# Altium PCB Photomodule.PcbDoc
Units mm, origin at the board's own origin, x right, y up, seen from the top; angles counter-clockwise.
Board outline 150 x 150 mm, 2 copper layers (Top Layer, Bottom Layer); 98 components, 80 nets, 420 pads, 0 vias.
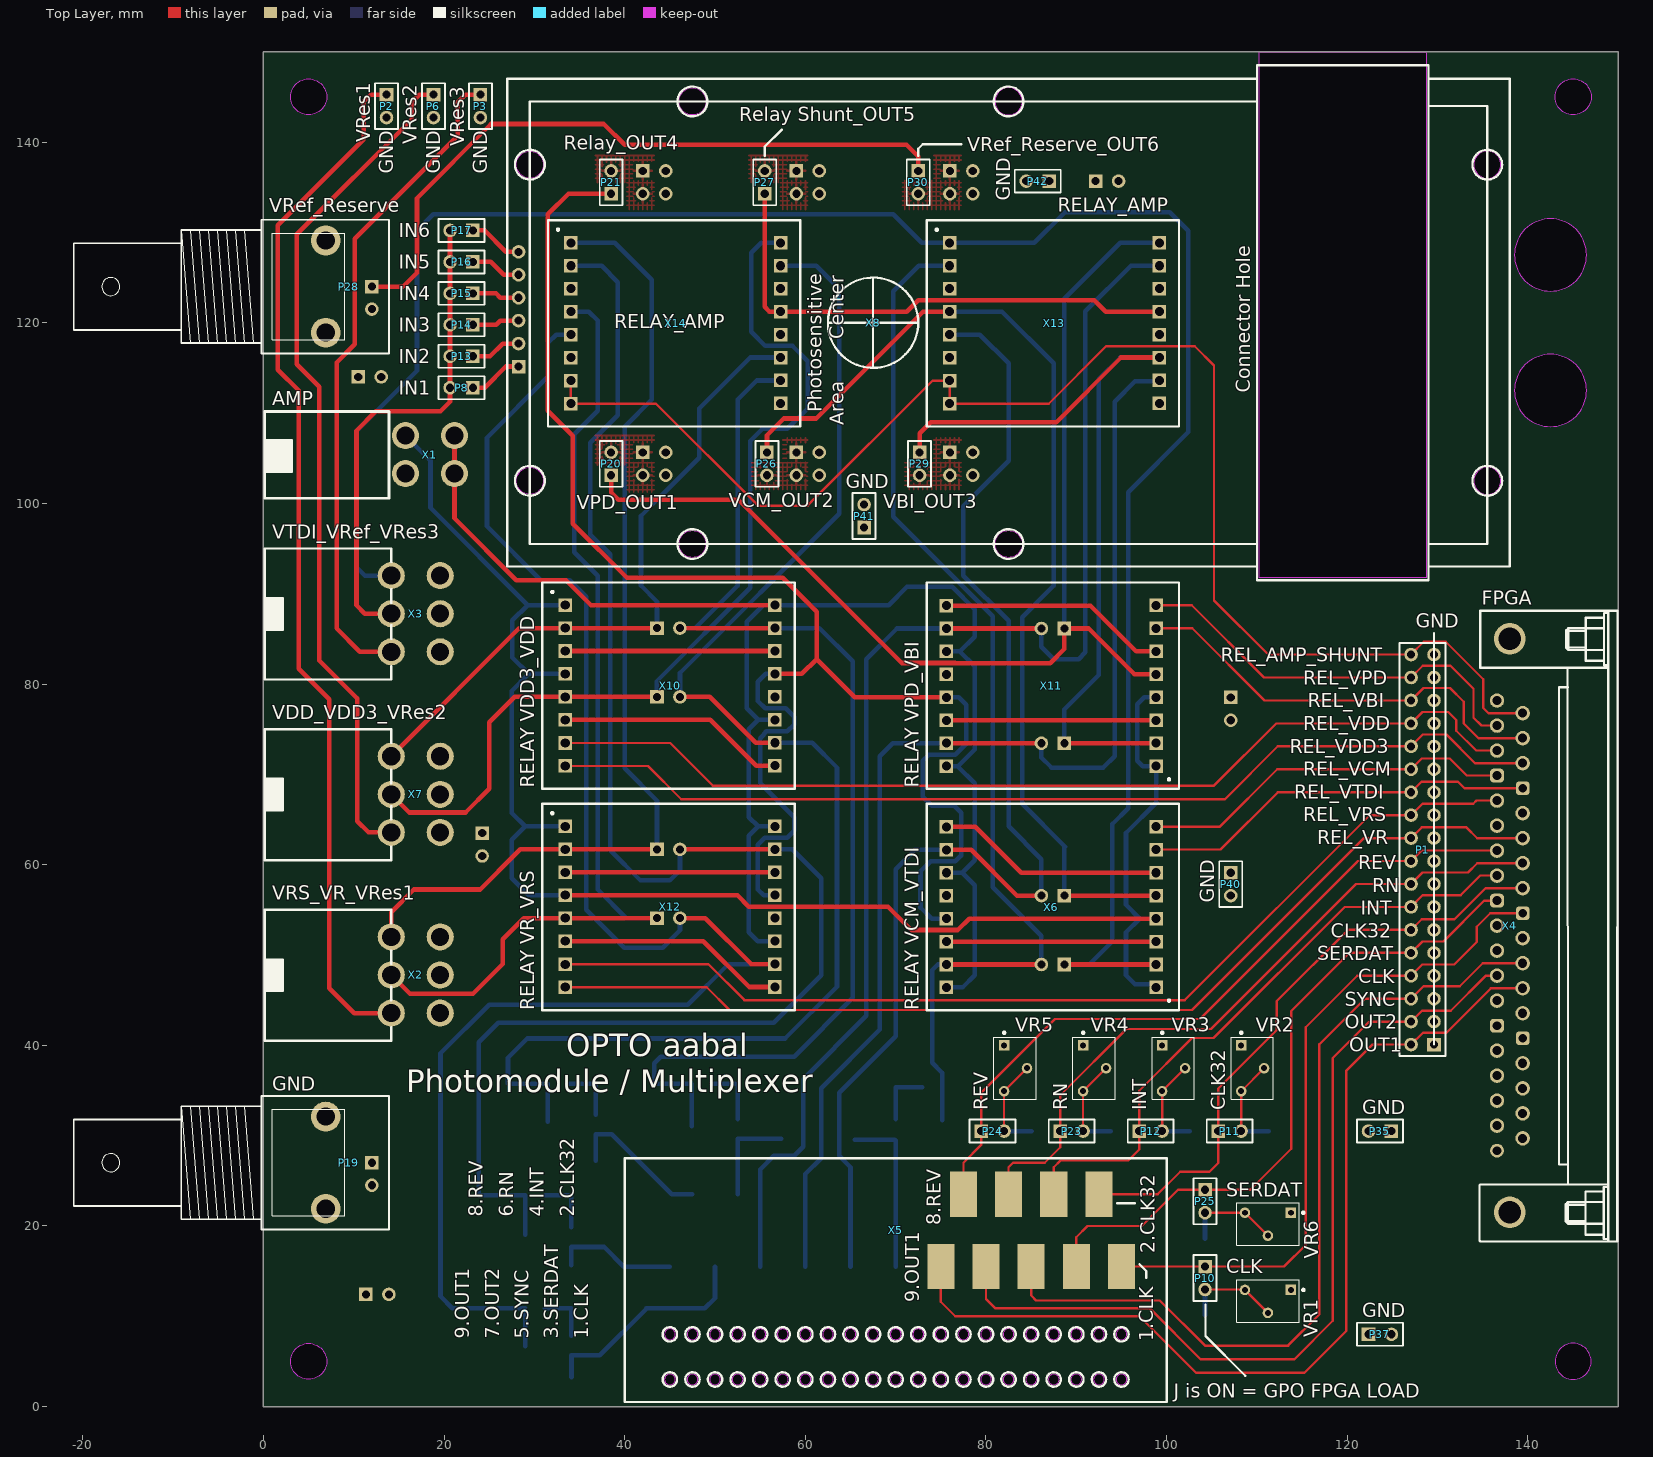
[diagram p0: Top Layer view]
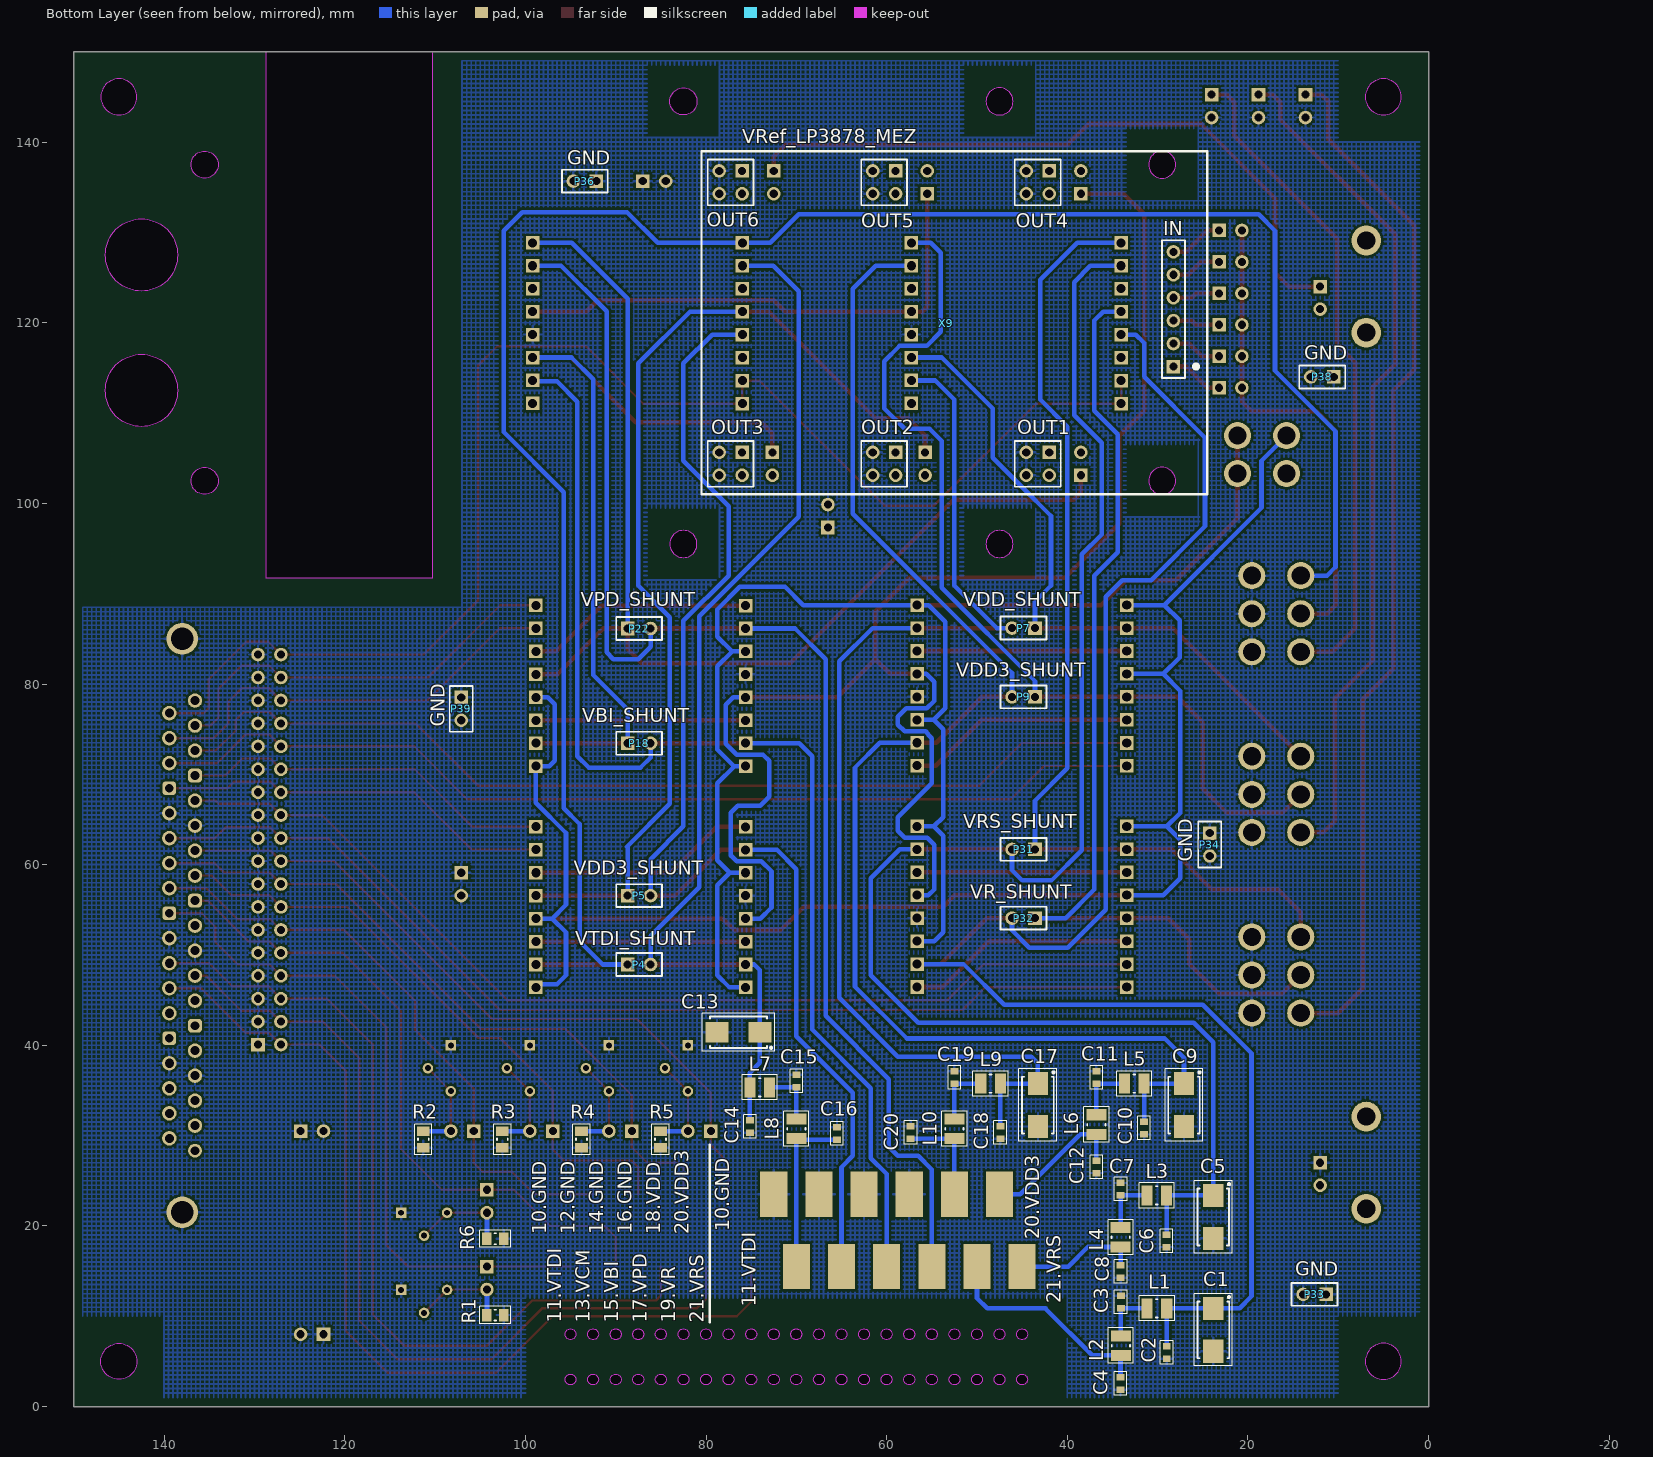
[diagram p1: Bottom Layer view, seen from below]

## Layer stack, top to bottom
Top Solder: solder mask 0.0102, Solder Resist, Dk 3.5
Top Layer: signal copper 0.0356
Dielectric 1: dielectric 0.32, FR-4, Dk 4.8
Bottom Layer: signal copper 0.0356
Bottom Solder: solder mask 0.0102, Solder Resist, Dk 3.5

## Board outline
0,0 0,150 150,150 150,0
cut-out: 138.5,127.5 ccw(c142.5,127.5) 142.5,123.5 ccw(c142.5,127.5) 146.5,127.5 ccw(c142.5,127.5) 142.5,131.5 ccw(c142.5,127.5)
cut-out: 138.5,112.5 ccw(c142.5,112.5) 142.5,108.5 ccw(c142.5,112.5) 146.5,112.5 ccw(c142.5,112.5) 142.5,116.5 ccw(c142.5,112.5)
cut-out: 31,137.5 cw(c29.5,137.5) 29.5,136 cw(c29.5,137.5) 28,137.5 cw(c29.5,137.5) 29.5,139 cw(c29.5,137.5)
cut-out: 49,144.5 cw(c47.5,144.5) 47.5,143 cw(c47.5,144.5) 46,144.5 cw(c47.5,144.5) 47.5,146 cw(c47.5,144.5)
cut-out: 82.5,143 ccw(c82.5,144.5) 84,144.5 ccw(c82.5,144.5) 82.5,146 ccw(c82.5,144.5) 81,144.5 ccw(c82.5,144.5)
cut-out: 135.5,136 ccw(c135.5,137.5) 137,137.5 ccw(c135.5,137.5) 135.5,139 ccw(c135.5,137.5) 134,137.5 ccw(c135.5,137.5)
cut-out: 135.5,101 ccw(c135.5,102.5) 137,102.5 ccw(c135.5,102.5) 135.5,104 ccw(c135.5,102.5) 134,102.5 ccw(c135.5,102.5)
cut-out: 31,102.5 cw(c29.5,102.5) 29.5,101 cw(c29.5,102.5) 28,102.5 cw(c29.5,102.5) 29.5,104 cw(c29.5,102.5)
cut-out: 49,95.5 cw(c47.5,95.5) 47.5,94 cw(c47.5,95.5) 46,95.5 cw(c47.5,95.5) 47.5,97 cw(c47.5,95.5)
cut-out: 84,95.5 cw(c82.5,95.5) 82.5,94 cw(c82.5,95.5) 81,95.5 cw(c82.5,95.5) 82.5,97 cw(c82.5,95.5)
cut-out: 5,3 cw(c5,5) 3,5 cw(c5,5) 5,7 cw(c5,5) 7,5 cw(c5,5)
cut-out: 143,5 ccw(c145,5) 145,3 ccw(c145,5) 147,5 ccw(c145,5) 145,7 ccw(c145,5)
cut-out: 145,143 cw(c145,145) 143,145 cw(c145,145) 145,147 cw(c145,145) 147,145 cw(c145,145)
cut-out: 5,143 cw(c5,145) 3,145 cw(c5,145) 5,147 cw(c5,145) 7,145 cw(c5,145)
cut-out: 44.4,3 ccw(c45,3) 45,2.4 ccw(c45,3) 45.6,3 ccw(c45,3) 45,3.6 ccw(c45,3)
cut-out: 46.9,3 ccw(c47.5,3) 47.5,2.4 ccw(c47.5,3) 48.1,3 ccw(c47.5,3) 47.5,3.6 ccw(c47.5,3)
cut-out: 49.4,3 ccw(c50,3) 50,2.4 ccw(c50,3) 50.6,3 ccw(c50,3) 50,3.6 ccw(c50,3)
cut-out: 51.9,3 ccw(c52.5,3) 52.5,2.4 ccw(c52.5,3) 53.1,3 ccw(c52.5,3) 52.5,3.6 ccw(c52.5,3)
cut-out: 54.4,3 ccw(c55,3) 55,2.4 ccw(c55,3) 55.6,3 ccw(c55,3) 55,3.6 ccw(c55,3)
cut-out: 56.9,3 ccw(c57.5,3) 57.5,2.4 ccw(c57.5,3) 58.1,3 ccw(c57.5,3) 57.5,3.6 ccw(c57.5,3)
cut-out: 59.4,3 ccw(c60,3) 60,2.4 ccw(c60,3) 60.6,3 ccw(c60,3) 60,3.6 ccw(c60,3)
cut-out: 61.9,3 ccw(c62.5,3) 62.5,2.4 ccw(c62.5,3) 63.1,3 ccw(c62.5,3) 62.5,3.6 ccw(c62.5,3)
cut-out: 64.4,3 ccw(c65,3) 65,2.4 ccw(c65,3) 65.6,3 ccw(c65,3) 65,3.6 ccw(c65,3)
cut-out: 66.9,3 ccw(c67.5,3) 67.5,2.4 ccw(c67.5,3) 68.1,3 ccw(c67.5,3) 67.5,3.6 ccw(c67.5,3)
cut-out: 69.4,3 ccw(c70,3) 70,2.4 ccw(c70,3) 70.6,3 ccw(c70,3) 70,3.6 ccw(c70,3)
cut-out: 71.9,3 ccw(c72.5,3) 72.5,2.4 ccw(c72.5,3) 73.1,3 ccw(c72.5,3) 72.5,3.6 ccw(c72.5,3)
cut-out: 74.4,3 ccw(c75,3) 75,2.4 ccw(c75,3) 75.6,3 ccw(c75,3) 75,3.6 ccw(c75,3)
cut-out: 76.9,3 ccw(c77.5,3) 77.5,2.4 ccw(c77.5,3) 78.1,3 ccw(c77.5,3) 77.5,3.6 ccw(c77.5,3)
cut-out: 79.4,3 ccw(c80,3) 80,2.4 ccw(c80,3) 80.6,3 ccw(c80,3) 80,3.6 ccw(c80,3)
cut-out: 81.9,3 ccw(c82.5,3) 82.5,2.4 ccw(c82.5,3) 83.1,3 ccw(c82.5,3) 82.5,3.6 ccw(c82.5,3)
cut-out: 84.4,3 ccw(c85,3) 85,2.4 ccw(c85,3) 85.6,3 ccw(c85,3) 85,3.6 ccw(c85,3)
cut-out: 86.9,3 ccw(c87.5,3) 87.5,2.4 ccw(c87.5,3) 88.1,3 ccw(c87.5,3) 87.5,3.6 ccw(c87.5,3)
cut-out: 89.4,3 ccw(c90,3) 90,2.4 ccw(c90,3) 90.6,3 ccw(c90,3) 90,3.6 ccw(c90,3)
cut-out: 91.9,3 ccw(c92.5,3) 92.5,2.4 ccw(c92.5,3) 93.1,3 ccw(c92.5,3) 92.5,3.6 ccw(c92.5,3)
cut-out: 94.4,3 ccw(c95,3) 95,2.4 ccw(c95,3) 95.6,3 ccw(c95,3) 95,3.6 ccw(c95,3)
cut-out: 94.4,8 ccw(c95,8) 95,7.4 ccw(c95,8) 95.6,8 ccw(c95,8) 95,8.6 ccw(c95,8)
cut-out: 91.9,8 ccw(c92.5,8) 92.5,7.4 ccw(c92.5,8) 93.1,8 ccw(c92.5,8) 92.5,8.6 ccw(c92.5,8)
cut-out: 89.4,8 ccw(c90,8) 90,7.4 ccw(c90,8) 90.6,8 ccw(c90,8) 90,8.6 ccw(c90,8)
cut-out: 86.9,8 ccw(c87.5,8) 87.5,7.4 ccw(c87.5,8) 88.1,8 ccw(c87.5,8) 87.5,8.6 ccw(c87.5,8)
cut-out: 84.4,8 ccw(c85,8) 85,7.4 ccw(c85,8) 85.6,8 ccw(c85,8) 85,8.6 ccw(c85,8)
cut-out: 81.9,8 ccw(c82.5,8) 82.5,7.4 ccw(c82.5,8) 83.1,8 ccw(c82.5,8) 82.5,8.6 ccw(c82.5,8)
cut-out: 79.4,8 ccw(c80,8) 80,7.4 ccw(c80,8) 80.6,8 ccw(c80,8) 80,8.6 ccw(c80,8)
cut-out: 76.9,8 ccw(c77.5,8) 77.5,7.4 ccw(c77.5,8) 78.1,8 ccw(c77.5,8) 77.5,8.6 ccw(c77.5,8)
cut-out: 74.4,8 ccw(c75,8) 75,7.4 ccw(c75,8) 75.6,8 ccw(c75,8) 75,8.6 ccw(c75,8)
cut-out: 71.9,8 ccw(c72.5,8) 72.5,7.4 ccw(c72.5,8) 73.1,8 ccw(c72.5,8) 72.5,8.6 ccw(c72.5,8)
cut-out: 69.4,8 ccw(c70,8) 70,7.4 ccw(c70,8) 70.6,8 ccw(c70,8) 70,8.6 ccw(c70,8)
cut-out: 66.9,8 ccw(c67.5,8) 67.5,7.4 ccw(c67.5,8) 68.1,8 ccw(c67.5,8) 67.5,8.6 ccw(c67.5,8)
cut-out: 64.4,8 ccw(c65,8) 65,7.4 ccw(c65,8) 65.6,8 ccw(c65,8) 65,8.6 ccw(c65,8)
cut-out: 61.9,8 ccw(c62.5,8) 62.5,7.4 ccw(c62.5,8) 63.1,8 ccw(c62.5,8) 62.5,8.6 ccw(c62.5,8)
cut-out: 59.4,8 ccw(c60,8) 60,7.4 ccw(c60,8) 60.6,8 ccw(c60,8) 60,8.6 ccw(c60,8)
cut-out: 56.9,8 ccw(c57.5,8) 57.5,7.4 ccw(c57.5,8) 58.1,8 ccw(c57.5,8) 57.5,8.6 ccw(c57.5,8)
cut-out: 54.4,8 ccw(c55,8) 55,7.4 ccw(c55,8) 55.6,8 ccw(c55,8) 55,8.6 ccw(c55,8)
cut-out: 51.9,8 ccw(c52.5,8) 52.5,7.4 ccw(c52.5,8) 53.1,8 ccw(c52.5,8) 52.5,8.6 ccw(c52.5,8)
cut-out: 49.4,8 ccw(c50,8) 50,7.4 ccw(c50,8) 50.6,8 ccw(c50,8) 50,8.6 ccw(c50,8)
cut-out: 46.9,8 ccw(c47.5,8) 47.5,7.4 ccw(c47.5,8) 48.1,8 ccw(c47.5,8) 47.5,8.6 ccw(c47.5,8)
cut-out: 44.4,8 ccw(c45,8) 45,7.4 ccw(c45,8) 45.6,8 ccw(c45,8) 45,8.6 ccw(c45,8)
cut-out: 128.75,91.75 110.25,91.75 110.25,150 128.75,150

## Design rules (kind name [scope] priority, off if disabled: settings)
Clearance [All] p1: gap=0.254 ignorepadtopadclearanceinfootprint=FALSE except(0: Arc-Hole Track-Hole SMDPad-Hole THPad-Hole Via-Hole Fill-Hole Poly-Hole Region-Hole Text-Hole)
Height [All] p1: minheight=0 maxheight=100 prefheight=50
PolygonConnect [All] p1: connectstyle=Relief reliefconductorwidth=0.254 reliefentries=4 polygonreliefangle="90 Angle" airgapwidth=0.254
RoutingVias [All] p1: holewidth=0.711 width=1.27 viastyle="Through Hole" minholewidth=0.711 minwidth=1.27 maxholewidth=0.711 maxwidth=1.27
SolderMaskExpansion [All] p1: expansion=0.102
Width [All] p1: maxlimit=0.508 minlimit=0.254 preferedwidth=0.254 minimp=50.000000 maximp=50.000000 favimp=50.000000
29 further rules are at their usual default settings.

## Components (designator, comment, footprint, x,y, rotation, side; value= is the part's Value field where it differs from the comment)
C1 "10uF" CAP_TANT_TypeC 23.825,8.5 r270 bottom
C2 "0,1uF" CAP_0603 28.99,6 r90 bottom
C3 "0,1uF" CAP_0603 34.075,11.565 r270 bottom
C4 "0,1uF" CAP_0603 34.11,2.545 r90 bottom
C5 "10uF" CAP_TANT_TypeC 23.834,21 r270 bottom
C6 "0,1uF" CAP_0603 29,18.355 r90 bottom
C7 "0,1uF" CAP_0603 34.085,24.065 r270 bottom
C8 "0,1uF" CAP_0603 34.085,14.945 r90 bottom
C9 "10uF" CAP_TANT_TypeC 27.08,33.375 r270 bottom
C10 "0,1uF" CAP_0603 31.495,30.824 r90 bottom
C11 "0,1uF" CAP_0603 36.779,36.44 r270 bottom
C12 "0,1uF" CAP_0603 36.779,26.545 r90 bottom
C13 "10uF" CAP_TANT_TypeC 76.41,41.45 r0 bottom
C14 "0,1uF" CAP_0603 75.135,31 r90 bottom
C15 "0,1uF" CAP_0603 70,36.04 r270 bottom
C16 "0,1uF" CAP_0603 65.485,30.25 r270 bottom
C17 "10uF" CAP_TANT_TypeC 43.25,33.375 r270 bottom
C18 "0,1uF" CAP_0603 47.415,30.355 r90 bottom
C19 "0,1uF" CAP_0603 52.5,36.44 r270 bottom
C20 "0,1uF" CAP_0603 57.335,30.355 r270 bottom
L1 "4,7uH" IND_2520 30.075,10.875 r0 bottom
L2 "4,7uH" IND_2520 34.075,6.75 r270 bottom
L3 "4,7uH" IND_2520 30.085,23.375 r0 bottom
L4 "4,7uH" IND_2520 34.085,18.75 r270 bottom
L5 "4,7uH" IND_2520 32.58,35.75 r0 bottom
L6 "4,7uH" IND_2520 36.779,31.219 r270 bottom
L7 "4,7uH" IND_2520 74.05,35.35 r180 bottom
L8 "4,7uH" IND_2520 70,30.75 r270 bottom
L9 "4,7uH" IND_2520 48.5,35.75 r0 bottom
L10 "4,7uH" IND_2520 52.5,30.75 r270 bottom
P1 "Header 18X2" HDR2X18 129.6,40.077 r90 top
P2 "VRes1" HDR1X2 13.628,145.25 r270 top
P3 "VRes3" HDR1X2 24.028,145.25 r270 top
P4 "VTDI_SHUNT" HDR1X2 88.673,48.944 r180 bottom
P5 "VDD3_SHUNT" HDR1X2 88.673,56.564 r180 bottom
P6 "VRes2" HDR1X2 18.828,145.25 r270 top
P7 "VDD_SHUNT" HDR1X2 43.577,86.195 r0 bottom
P8 "IN1" HDR1X2 23.2,112.8 r180 top
P9 "VDD3_SHUNT" HDR1X2 43.577,78.575 r0 bottom
P10 "LOAD_CLK" HDR1X2 104.25,15.5 r270 top
P11 "LOAD_CLK32" HDR1X2 105.71,30.5 r0 top
P12 "LOAD_INT" HDR1X2 96.96,30.5 r0 top
P13 "IN2" HDR1X2 23.2,116.284 r180 top
P14 "IN3" HDR1X2 23.2,119.768 r180 top
P15 "IN4" HDR1X2 23.2,123.252 r180 top
P16 "IN5" HDR1X2 23.2,126.736 r180 top
P17 "IN6" HDR1X2 23.2,130.22 r180 top
P18 "VBI_SHUNT" HDR1X2 88.673,73.444 r180 bottom
P19 "GND" "BNC_RA CON" 12,27 r0 top
P20 "VPD_OUT1" HDR1X2 38.5,103.11 r90 top
P21 "Relay_OUT4" HDR1X2 38.5,134.273 r90 top
P22 "VPD_SHUNT" HDR1X2 88.673,86.144 r180 bottom
P23 "LOAD_RN" HDR1X2 88.21,30.5 r0 top
P24 "LOAD_REV" HDR1X2 79.46,30.5 r0 top
P25 "LOAD_SERDAT" HDR1X2 104.25,24 r270 top
P26 "VCM_OUT2" HDR1X2 55.75,105.65 r270 top
P27 "Relay Shunt_OUT5" HDR1X2 55.5,134.274 r90 top
P28 "VRef_Reserve" "BNC_RA CON" 12,124 r0 top
P29 "VBI_OUT3" HDR1X2 72.65,105.65 r270 top
P30 "VRef_Reserve_OUT6" HDR1X2 72.5,136.814 r270 top
P31 "VRS_SHUNT" HDR1X2 43.577,61.695 r0 bottom
P32 "VR_SHUNT" HDR1X2 43.577,54.075 r0 bottom
P33 "GND" HDR1X2 11.35,12.426 r0 bottom
P34 "GND" HDR1X2 24.221,63.5 r270 bottom
P35 "GND" HDR1X2 124.89,30.5 r180 top
P36 "GND" HDR1X2 92.142,135.673 r0 bottom
P37 "GND" HDR1X2 122.35,8 r0 top
P38 "GND" HDR1X2 10.5,114 r0 bottom
P39 "GND" HDR1X2 107.1,78.524 r270 bottom
P40 "GND" HDR1X2 107.1,59.104 r270 top
P41 "GND" HDR1X2 66.5,97.325 r90 top
P42 "GND" HDR1X2 87,135.673 r180 top
R1 "RES" RES_0805 103.325,10.13 r0 bottom
R2 "RES" RES_0805 111.29,29.575 r90 bottom
R3 "RES" RES_0805 102.54,29.575 r90 bottom
R4 "RES" RES_0805 93.79,29.575 r90 bottom
R5 "RES" RES_0805 85.04,29.575 r90 bottom
R6 "RES" RES_0805 103.325,18.58 r0 bottom
VR1 "RES 3266W" "RES 3266W" 113.75,12.91 r180 top
VR2 "RES 3266W" "RES 3266W" 108.25,40 r270 top
VR3 "RES 3266W" "RES 3266W" 99.5,40 r270 top
VR4 "RES 3266W" "RES 3266W" 90.75,40 r270 top
VR5 "RES 3266W" "RES 3266W" 82,40 r270 top
VR6 "RES 3266W" "RES 3266W" 113.75,21.46 r180 top
X1 "AMP" AMP_VOLTMETR 21.15,107.5 r270 top
X2 "VRS_VR_VRes1" POWER 14.15,52 r90 top
X3 "VTDI_VRef_VRes3" POWER 14.15,92 r90 top
X4 "FPGA" CHEAP_CONN_FEMALE 138,85 r270 top
X5 "Photomodule Connector" Photomodule_Electric 45,3 r90 top
X6 "RELAY VCM_VTDI" RELAY_MODULE 101.373,66.749 r180 top
X7 "VDD_VDD3_VRes2" POWER 14.15,72 r90 top
X8 "Photomodule 3D body & Drill" "Photomodule_3D Body & Drill" 67.5,120 r90 top locked
X9 "VRef_LP3878_MEZ" VRef_LP3878_MEZ 24.5,139 r0 bottom locked
X10 "RELAY VDD3_VDD" RELAY_MODULE 30.877,68.389 r0 top
X11 "RELAY VPD_VBI" RELAY_MODULE 101.373,91.249 r180 top
X12 "RELAY VR_VRS" RELAY_MODULE 30.877,43.889 r0 top
X13 "RELAY_AMP" RELAY_MODULE 73.433,108.5 r0 top locked
X14 "RELAY_AMP" RELAY_MODULE 31.5,108.5 r0 top locked

## Footprints (in the part's own frame and the unit in brackets; to place one, negate y for a bottom-side part, rotate by r counter-clockwise, add the part's x,y. Pads: shape width x height; smd on the part's side, far side on the other; paste and mask are expansions set on the pad)
AMP_VOLTMETR [mm]
  round 3 hole 2: 1(0,0) 2(0,-5.423) 3(4.2,-5.423) 4(4.2,0)
  silkscreen extent -2.66,-21 6.94,-7.25
"BNC_RA CON" [mm] "Connector; BNC Elbow"
  rect 1.5x1.5 hole 0.9: 1(0,0)
  round 3.3 hole 2: 2(-5.1,-5.1) 2(-5.1,5.1)
  round 1.5 hole 0.9: 2(0,-2.5)
  silkscreen extent -33,-7.4 1.9,7.4
CAP_0603 [mm]
  rect 0.72x0.88 smd: 1(-0.69,0) 2(0.69,0)
  silkscreen extent -1.3,-0.7 1.3,0.7, body extent -0.8,-0.4 0.8,0.4, height 0.9
CAP_TANT_TypeC [mm] "Molded Capacitor, 2-Leads, Body 6,00x3,20mm, IPC Medium Density"
  rect 2.55x2.25 smd: 1(-2.375,0) 2(2.375,0)
  silkscreen extent -4,-2.1 4,2.1, body extent -3.15,-1.75 3.15,1.75, height 2.8
CHEAP_CONN_FEMALE [mm] "CHEAP_CONN_FEMALE"
  round 1.6 hole 1: 1(6.833,-1.422) 2(9.601,-1.422) 3(12.37,-1.422) 5(17.907,-1.422) 6(20.676,-1.422) 7(23.444,-1.422) 8(26.213,-1.422) 10(31.75,-1.422) 11(34.519,-1.422) 12(37.287,-1.422) 13(40.056,-1.422) 15(45.593,-1.422) 16(48.362,-1.422) 17(51.13,-1.422) 18(53.899,-1.422) 20(8.23,1.422) 21(10.998,1.422) 22(13.767,1.422) 24(19.304,1.422) 25(22.073,1.422) 26(24.841,1.422) 27(27.61,1.422) 29(33.147,1.422) 30(35.916,1.422) 31(38.684,1.422) 32(41.453,1.422) 34(46.99,1.422) 35(49.759,1.422) 36(52.527,1.422) 37(55.296,1.422)
  rrect50% 1.524x1.524 hole 0.965: 4(15.138,-1.422) 9(28.981,-1.422) 14(42.824,-1.422) 23(16.535,1.422) 28(30.378,1.422) 33(44.221,1.422)
  round 1.524 hole 0.965: 19(56.667,-1.422)
  round 3.5 hole 2.5: 38(0,0) 39(63.5,0)
  silkscreen extent -3.11,-3.36 66.72,11.92
HDR1X2 [mm] "Connector; Header; 2 Position"
  rect 1.5x1.5 hole 0.9: 1(0,0)
  round 1.5 hole 0.9: 2(2.54,0)
  silkscreen extent -1.27,-1.27 3.81,1.27
HDR2X18 [mm] "Connector; Header; 18x2 Position"
  rect 1.5x1.5 hole 0.9: 1(0,0)
  round 1.5 hole 0.9: 2(0,2.54) 3(2.54,0) 4(2.54,2.54) 5(5.08,0) 6(5.08,2.54) 7(7.62,0) 8(7.62,2.54) 9(10.16,0) 10(10.16,2.54) 11(12.7,0) 12(12.7,2.54) 13(15.24,0) 14(15.24,2.54) 15(17.78,0) 16(17.78,2.54) 17(20.32,0) 18(20.32,2.54) 19(22.86,0) 20(22.86,2.54) 21(25.4,0) 22(25.4,2.54) 23(27.94,0) 24(27.94,2.54) 25(30.48,0) 26(30.48,2.54) 27(33.02,0) 28(33.02,2.54) 29(35.56,0) 30(35.56,2.54) 31(38.1,0) 32(38.1,2.54) 33(40.64,0) 34(40.64,2.54) 35(43.18,0) 36(43.18,2.54)
  silkscreen extent -1.27,-1.27 44.45,3.81
IND_2520 [mm] "Chip Inductor, 2-Leads, Body 2,50x2,00mm, IPC Medium Density"
  rect 1.23x2.22 smd: 1(-1.085,0) 2(1.085,0)
  silkscreen extent -1.95,-1.4 1.95,1.4, body extent -1.35,-1.1 1.35,1.1, height 1
"Photomodule_3D Body & Drill" [mm]
  silkscreen extent -28.5,-70.5 28.5,40.5, body extent -27.5,-71 27.5,41, height 38
Photomodule_Electric [mm]
  rect 5x3 smd: 1(12.5,-50) 2(20.5,-47.5) 3(12.5,-45) 4(20.5,-42.5) 5(12.5,-40) 6(20.5,-37.5) 7(12.5,-35) 8(20.5,-32.5) 9(12.5,-30)
  rect 5x3 smd far side: 10(20.5,-27.5) 11(12.5,-25) 12(20.5,-22.5) 13(12.5,-20) 14(20.5,-17.5) 15(12.5,-15) 16(20.5,-12.5) 17(12.5,-10) 18(20.5,-7.5) 19(12.5,-5) 20(20.5,-2.5) 21(12.5,0)
  silkscreen extent -2.5,-55 24.5,5
POWER [mm] "POWER"
  round 3 hole 2: 1(0,0) 2(-4.217,0) 3(-8.435,0) 4(0,-5.422) 5(-4.217,-5.422) 6(-8.435,-5.422)
  silkscreen extent -11.5,0 3,14
RELAY_MODULE [mm]
  rect 1.5x1.5 hole 1: 1(2.54,20.345) 2(2.54,17.805) 3(2.54,15.265) 4(2.54,12.725) 5(2.54,10.185) 6(2.54,7.645) 7(2.54,5.08) 8(2.54,2.54) 9(25.756,2.565) 10(25.756,5.105) 11(25.756,7.645) 12(25.756,10.185) 13(25.756,12.725) 14(25.756,15.265) 15(25.756,17.805) 16(25.756,20.345)
  silkscreen extent 0,0 27.94,22.86, body extent 0,0 27.95,22.88, height 15.7
"RES 3266W" [mm]
  rect 1.168x1.168 hole 0.66: 1(0,0)
  round 1.168 hole 0.66: 2(2.54,2.54) 3(5.08,0)
  silkscreen extent -1.49,-1.12 5.99,3.58, body extent -0.81,-1.02 5.9,3.48, height 8.77
RES_0805 [mm]
  rect 1.05x1.4 smd: 1(-0.925,0) 2(0.925,0)
  silkscreen extent -1.7,-0.95 1.7,0.95, body extent -1.1,-0.7 1.1,0.7, height 1
VRef_LP3878_MEZ [mm]
  rect 1.5x1.5 hole 0.9: 1(3.75,23.85) 7(17.5,33.35) 8(34.5,33.35) 9(51.5,33.35) 10(17.5,2.187) 11(34.5,2.187) 12(51.5,2.187)
  round 1.5 hole 0.9: 2(3.75,21.31) 3(3.75,18.77) 4(3.75,16.23) 5(3.75,13.69) 6(3.75,11.15) 7(17.5,35.89) 8(34.5,35.89) 9(51.5,35.89) 10(17.5,4.727) 11(34.5,4.727) 12(51.5,4.727) 13(20.04,2.187) 13(20.04,4.727) 13(20.04,33.35) 13(20.04,35.89) 13(37.04,2.187) 13(37.04,4.727) 13(37.04,33.35) 13(37.04,35.89) 13(54.04,2.187) 13(54.04,4.727) 13(54.04,33.35) 13(54.04,35.89)
  silkscreen extent 0,0 56,38, body extent 0,0 56,38, height 18.8

## Part data
C1 C5 C9 C13 C17: library part CAP_Tantalum
C2 C3 C4 C6 C7 C8 C10 C11 C12 C14 C15 C16 C18 C19 C20: library part CAP
L1 L2 L3 L4 L5 L6 L7 L8 L9 L10: library part IND
P1: "Header, 18-Pin, Dual row", LatestRevisionDate=17-Jul-2002, LatestRevisionNote="Re-released for DXP Platform.", Publisher="Altium Limited"
P2 P3 P4 P5 P6 P7 P8 P9 P10 P11 P12 P13 P14 P15 P16 P17 P18 P20 P21 P22 P23 P24 P25 P26 P27 P29 P30 P31 P32 P33 P34 P35 P36 P37 P38 P39 P40 P41 P42: library part "Header 2", "Header, 2-Pin", LatestRevisionDate=17-Jul-2002, LatestRevisionNote="Re-released for DXP Platform.", Publisher="Altium Limited"
P19 P28: library part BNC, "BNC Elbow Connector", LatestRevisionDate=17-Jul-2002, LatestRevisionNote="Re-released for DXP Platform.", Publisher="Altium Limited"
X1: library part AMP_VOLTMETR
X2 X3 X7: library part POWER
X4: library part CHEAP_CON_37_FEMALE
X6 X10 X11 X12 X13 X14: library part MEZON_RELAY
X8: library part "Phoromodule 3D body & Drill"

## Nets (pads, with @x,y where several pads share a name; then routed paths per layer and width w, separated by ;. In a path a pad name is that pad's centre, name@x,y a point inside that pad or via, vN(x,y) a via of type N, cw(c..) or ccw(c..) an arc to the next point about the centre after c; other vN are vias at no path point)
A+: X1.2 X6.1 X6.4 X10.1 X10.4 X11.1 X11.4 X12.1 X12.4 | length 187.4
  Top Layer w0.508: X12.4 52.485,56.615 53.75,55.35 69.15,55.35 71.734,52.766 76.875,52.766 78.133,54.024 X6.4
  Bottom Layer w0.508: X1.2 18.5,104.727 18.5,99.5 29.265,88.735 ; X12.4 29.385,56.615 27.5,58.5 27.5,62.75 28.985,64.235 ; X12.1 28.985,64.235 ; X10.4 29.385,81.115 ; X10.1 29.265,88.735 ; X6.1 98.487,46.75 96.5,46.75 95.5,47.75 95.5,52.5 97.024,54.024 ; X6.4 97.024,54.024 ; X11.4 97.524,78.524 96.75,77.75 96.75,71.5 97.346,70.904 X11.1 98.833,66.833 95.5,63.5 95.5,55.548 97.024,54.024 ; 28.985,64.235 27.5,65.719 27.5,79.229 29.385,81.115 ; 29.265,88.735 27.569,87.039 27.569,82.931 29.385,81.115
A-: X1.1 X1.4 X6.11 X6.16 X10.11 X10.16 X11.11 X11.16 X12.11 X12.16 | length 172.4
  Top Layer w0.508: X1.1 X1.4 21.15,98.35 28,91.5 33.5,91.5 36.265,88.735 X10.16
  Bottom Layer w0.508: X12.11 54.715,51.535 53.75,52.5 53.75,63.219 54.765,64.235 ; X12.16 54.765,64.235 ; X10.11 54.785,76.035 ; X6.16 77.404,46.404 78.75,47.75 78.75,57.708 77.354,59.104 ; X6.11 77.354,59.104 ; X11.16 76.904,70.904 ; X11.11 77.104,83.604 ; 54.765,64.235 53.75,65.25 53.75,75 54.785,76.035 ; 54.785,76.035 53.5,77.319 53.5,86.9 55.335,88.735 X10.16 69.235,88.735 71.25,90.75 76.25,90.75 78.75,88.25 78.75,85.25 77.104,83.604 ; 76.904,70.904 78.75,72.75 78.75,81.958 77.104,83.604 ; 76.904,70.904 76.904,70.846 78.75,69 78.75,60.5 77.354,59.104
CLK: P1.8 P10.1 X4.28 X5.1 | length 75.7
  Top Layer w0.254: X5.1 P10.1 113,15.5 115.4,17.9 115.4,42 121.097,47.697 P1.8 128.313,48.95 131.85,48.95 134.325,51.425 134.325,53.125 135.822,54.622 X4.28
CLK32: P1.12 P11.1 X4.27 X5.2 | length 67.7
  Top Layer w0.254: X5.2 99,23.5 101.5,26 104.75,26 105.71,26.96 P11.1 105.71,35.21 112.2,41.7 112.2,44.9 120.077,52.777 P1.12 128.233,53.95 131.875,53.95 135.315,57.39 X4.27
GND: C1.2 C2.1 C3.1 C4.1 C5.2 C6.1 C7.1 C8.1 C9.2 C10.1 C11.1 C12.1 C13.2 C14.1 C15.1 C16.1 C17.2 C18.1 C19.1 C20.1 P1.1 P1.3 P1.5 P1.7 P1.9 P1.11 P1.13 P1.15 P1.17 P1.19 P1.21 P1.23 P1.25 P1.27 P1.29 P1.31 P1.33 P1.35 P2.2 P3.2 P6.2 P19.1 P33.1 P33.2 P34.1 P34.2 P35.1 P35.2 P36.1 P36.2 P37.1 P37.2 P38.1 P38.2 P39.1 P39.2 P40.1 P40.2 P41.1 P41.2 P42.1 P42.2 R1.1 R2.1 R3.1 R4.1 R5.1 R6.1 VR1.1 VR2.1 VR3.1 VR4.1 VR5.1 VR6.1 X2.4 X2.5 X2.6 X3.4 X3.5 X3.6 X4.6 X4.11 X4.16 X4.24 X4.29 X4.34 X4.38 X4.39 X5.10 X5.12 X5.14 X5.16 X6.12 X7.4 X7.5 X7.6 X9.13 X10.12 X11.12 X12.12 X13.12 X14.12
IN1: P8.1 X9.1 | length 6
  Top Layer w0.508: P8.1 24.5,112.8 26.85,115.15 X9.1
IN2: P13.1 X9.2 | length 5.6
  Top Layer w0.508: P13.1 25.084,116.284 26.49,117.69 X9.2
IN3: P14.1 X9.3 | length 5.2
  Top Layer w0.508: P14.1 25.768,119.768 26.23,120.23 X9.3
IN4: P15.1 X9.4 | length 5.2
  Top Layer w0.508: P15.1 25.748,123.252 26.23,122.77 X9.4
IN5: P16.1 X9.5 | length 5.6
  Top Layer w0.508: P16.1 25.164,126.736 26.59,125.31 X9.5
IN6: P17.1 X9.6 | length 6
  Top Layer w0.508: P17.1 24.48,130.22 26.85,127.85 X9.6
INT: P1.14 P12.1 X4.8 X5.4 | length 69.3
  Top Layer w0.254: X5.4 87.5,26.5 88.25,27.25 95.75,27.25 96.96,28.46 P12.1 96.96,34.96 102.8,40.8 105.2,40.8 119.717,55.317 P1.14 128.368,56.625 132.563,56.625 134.725,58.787 X4.8
NetC3_2: C3.2 L1.2 L2.1 | length 6
  Bottom Layer w0.508: L1.2 C3.2 L2.1
NetC7_2: C7.2 L3.2 L4.1 | length 6.5
  Bottom Layer w0.508: L3.2 C7.2 L4.1
NetC11_2: C11.2 L5.2 L6.1 | length 6.6
  Bottom Layer w0.508: L5.2 C11.2 L6.1
NetC15_2: C15.2 L7.2 L8.1 | length 6.5
  Bottom Layer w0.508: L8.1 C15.2 L7.2
NetC19_2: C19.2 L9.2 L10.1 | length 6.8
  Bottom Layer w0.508: L9.2 C19.2 ; L10.1 C19.2
NetP2_1: P2.1 X2.3 | length 115.3
  Top Layer w0.508: P2.1 11.85,145.25 11.1,144.5 11.1,140.3 1.6,130.8 1.6,114.8 3.9,112.5 3.9,81.7 7.3,78.3 7.3,46.3 10.035,43.565 X2.3
NetP3_1: P3.1 X3.3 | length 73.8
  Top Layer w0.508: X3.3 10.685,83.565 8.1,86.15 8.1,115.6 10.1,117.6 10.1,129.3 21.5,140.7 21.5,144.4 22.35,145.25 P3.1
NetP6_1: P6.1 X7.3 | length 94.7
  Top Layer w0.508: X7.3 11.635,63.565 10.4,64.8 10.4,78.4 6.2,82.6 6.2,112.9 3.7,115.4 3.7,129.8 16.4,142.5 16.4,144.4 17.25,145.25 P6.1
NetP10_2: P10.2 R1.2 VR1.2 VR1.3 | length 10.9
  Top Layer w0.254: P10.2 108.62,12.96 VR1.3 VR1.2
  Bottom Layer w0.508: R1.2 P10.2
NetP11_2: P11.2 R2.2 VR2.2 VR2.3 | length 11.1
  Top Layer w0.254: P11.2 VR2.3 VR2.2
  Bottom Layer w0.508: P11.2 R2.2
NetP12_2: P12.2 R3.2 VR3.2 VR3.3 | length 11.1
  Top Layer w0.254: P12.2 VR3.3 VR3.2
  Bottom Layer w0.508: P12.2 R3.2
NetP23_2: P23.2 R4.2 VR4.2 VR4.3 | length 11.1
  Top Layer w0.254: P23.2 VR4.3 VR4.2
  Bottom Layer w0.508: P23.2 R4.2
NetP24_2: P24.2 R5.2 VR5.2 VR5.3 | length 11.1
  Top Layer w0.254: P24.2 VR5.3 VR5.2
  Bottom Layer w0.508: P24.2 R5.2
NetP25_2: P25.2 R6.2 VR6.2 VR6.3 | length 10.9
  Top Layer w0.254: P25.2 VR6.3 VR6.2
  Bottom Layer w0.508: R6.2 P25.2
NetX6_3: X6.3 X6.14 | length 23.2
  Top Layer w0.508: X6.14 X6.3
NetX6_6: X6.6 X6.9 | length 25.3
  Top Layer w0.508: X6.9 78.816,64.184 83.896,59.104 X6.6
NetX10_3: X10.3 X10.14 | length 23.2
  Top Layer w0.508: X10.3 X10.14
NetX10_6: X10.6 X10.9 | length 25.3
  Top Layer w0.508: X10.6 49.465,76.035 54.545,70.955 X10.9
NetX11_3: X11.3 X11.14 | length 23.2
  Top Layer w0.508: X11.14 X11.3
NetX11_6: X11.6 X11.9 | length 25.3
  Top Layer w0.508: X11.9 91.566,88.684 96.646,83.604 X11.6
NetX12_3: X12.3 X12.14 | length 23.6
  Top Layer w0.508: X12.3@33.061,59.155 X12.3 X12.14
NetX12_6: X12.6 X12.9 | length 25.3
  Top Layer w0.508: X12.6 48.715,51.535 53.795,46.455 X12.9
OUT1: P1.2 X4.31 X5.9 | length 106.1
  Top Layer w0.254: X5.9 75,11.6 76.6,10 97,10 103.25,3.75 115.25,3.75 119.9,8.4 119.9,37.2 122.777,40.077 P1.2 128.383,41.4 130.984,41.4 135.9,46.316 X4.31
OUT2: P1.4 X4.12 X5.7 | length 97.6
  Top Layer w0.254: X5.7 80,11.9 81,10.9 98.1,10.9 103.75,5.25 114.15,5.25 118.4,9.5 118.4,38.6 122.417,42.617 P1.4 128.268,43.825 131.462,43.825 135.35,47.713 X4.12
RELAY_AMP_SHUNT: P1.36 X4.20 X13.7 X13.8 X14.7 X14.8 | length 158.6
  Top Layer w0.254: X14.7 X14.8 43.46,111.04 54.75,99.75 60.25,99.75 74.08,113.58 X13.7 X13.8 86.94,111.04 93.3,117.4 103.1,117.4 105.25,115.25 105.25,89.25 111.243,83.257 P1.36 128.478,84.675 130.9,84.675 135.05,80.525 135.05,77.35 135.63,76.77 X4.20
RELAY_VBI: P1.32 X4.21 X11.7 | length 48.2
  Top Layer w0.254: X11.7 102.831,86.169 110.823,78.177 P1.32 128.433,79.55 131.375,79.55 132.9,78.025 132.9,75.625 134.523,74.002 X4.21
RELAY_VCM: P1.26 X4.4 X6.8 | length 41.6
  Top Layer w0.254: X6.8 105.909,64.209 112.257,70.557 P1.26 128.253,71.75 131.35,71.75 133.238,69.862 X4.4
RELAY_VDD: P1.30 X4.3 X10.7 | length 110.9
  Top Layer w0.254: X10.7 45.031,73.469 49.75,68.75 105.25,68.75 112.137,75.637 P1.30 128.323,76.9 131.175,76.9 132.075,76 132.075,74.83 134.275,72.63 X4.3
RELAY_VDD3: P1.28 X4.22 X10.8 | length 111.8
  Top Layer w0.254: X10.8 42.571,70.929 46.25,67.25 106.45,67.25 112.297,73.097 P1.28 128.363,74.4 130.975,74.4 134.142,71.233 X4.22
RELAY_VPD: P1.34 X4.2 X11.8 | length 46.2
  Top Layer w0.254: X11.8 102.791,88.709 110.783,80.717 P1.34 128.368,82.025 131.425,82.025 133.975,79.475 133.975,76.275 134.851,75.399 X4.2
RELAY_VR: P1.20 X4.25 X12.8 | length 115.9
  Top Layer w0.254: X12.8 49.071,46.429 51.6,43.9 102.8,43.9 121.837,62.937 P1.20 128.248,64.125 133.2,64.125 134.398,62.927 X4.25
RELAY_VRS: P1.22 X4.5 X12.7 | length 114
  Top Layer w0.254: X12.7 49.281,48.969 53.25,45 102,45 122.477,65.477 P1.22 128.333,66.75 133.95,66.75 134.293,67.093 X4.5
RELAY_VTDI: P1.24 X4.23 X6.7 | length 44
  Top Layer w0.254: X6.7 105.969,61.669 112.317,68.017 P1.24 128.218,69.175 132.265,69.175 132.975,68.465 X4.23
REV: P1.18 P24.1 X4.7 X5.8 | length 80.3
  Top Layer w0.254: X5.8 77.5,27 79.46,28.96 P24.1 79.46,34.71 87.65,42.9 103.7,42.9 121.197,60.397 P1.18 128.219,61.556 X4.7
RN: P1.16 P23.1 X4.26 X5.6 | length 77.2
  Top Layer w0.254: X5.6 82.5,26.5 83,27 86.5,27 88.21,28.71 P23.1 88.21,34.46 95.55,41.8 104.9,41.8 120.957,57.857 P1.16 128.328,59.125 133.366,59.125 134.4,60.159 X4.26
SERDAT: P1.10 P25.1 X4.9 X5.3 | length 74.2
  Top Layer w0.254: X5.3 90,18.75 91.25,20 97.251,20 101.25,24 P25.1 109.25,24 113.8,28.55 113.8,43.8 120.237,50.237 P1.10 128.323,51.5 130.65,51.5 135.169,56.019 X4.9
SYNC: P1.6 X4.30 X5.5 | length 95
  Top Layer w0.254: X5.5 85,12.3 85.55,11.75 99.25,11.75 104.25,6.75 113.45,6.75 116.9,10.2 116.9,40.1 121.957,45.157 P1.6 128.428,46.525 132.441,46.525 135,49.084 X4.30
VBI: P18.1 P29.1 X11.2 X13.11 | length 91.8
  Top Layer w0.508: P29.1 72.65,107.75 73.9,109 87.8,109 94.946,116.146 X13.11 ; P18.1 X11.2
  Bottom Layer w0.508: P18.1 88.673,77.173 92.5,81 92.5,113.75 94.896,116.146 X13.11
VBI_a: P18.2 X5.15 X11.15 X13.10 | length 134.2
  Top Layer w0.508: X11.15 P18.2
  Bottom Layer w0.508: X5.15 60,25.75 61.75,27.5 61.75,35.25 68.25,41.75 68.25,72 69.694,73.444 X11.15 ; P18.2 86.133,71.867 87.25,70.75 93,70.75 94.25,72 94.25,111.25 96.5,113.5 99.083,113.5 X13.10
VCM: P5.1 P26.1 X6.5 X13.4 | length 114.2
  Top Layer w0.508: P26.1 55.75,107.55 57.6,109.4 61.2,109.4 73.026,121.226 X13.4 ; P5.1 X6.5
  Bottom Layer w0.508: X13.4 81.774,121.226 87.5,115.5 87.5,90.9 84,87.4 84,66.75 88.75,62 88.673,61.923 P5.1
VCM_a: P5.2 X5.13 X6.10 X13.5 | length 138.7
  Top Layer w0.508: X6.10 78.356,61.644 83.436,56.564 P5.2
  Bottom Layer w0.508: X5.13 65,26.5 63.75,27.75 63.75,34.75 70,41 70,59.5 72.144,61.644 X6.10 ; X13.5 79.314,118.686 82.5,115.5 82.5,104.7 77.5,99.7 77.5,92 82.5,87 82.5,64.25 86.133,60.617 P5.2
VDD: P7.1 X7.1 X10.2 X14.11 | length 73.6
  Top Layer w0.508: X7.1 28.345,86.195 X10.2 P7.1
  Bottom Layer w0.508: 43.577,86.945 43.577,89.123 41.8,90.9 41.8,98.6 45.052,101.852 45.061,101.852 48.25,105.041 48.25,110.5 53.896,116.146 X14.11
VDD3: P9.1 X7.2 X10.5 X14.16 | length 105.6
  Top Layer w0.508: X7.2 16.158,65.775 22.375,65.775 25,68.4 25,75.75 27.825,78.575 X10.5 P9.1
  Bottom Layer w0.508: P9.1 43.577,80.327 53.9,90.65 53.9,106.9 55.25,108.25 58,108.25 60.25,110.5 60.25,115.75 58.572,117.428 55.572,117.428 54,119 54,127.75 55.096,128.846 X14.16
VDD3_a: C9.1 C10.2 L5.1 P9.2 X10.10 X14.15 | length 156.1
  Top Layer w0.508: P9.2 49.425,78.575 54.505,73.495 X10.10
  Bottom Layer w0.508: C10.2 L5.1 C9.1 27.08,38.63 29.2,40.75 57.75,40.75 63.5,46.5 63.5,70.75 60.755,73.495 X10.10 ; P9.2 46.117,81.217 63.75,98.85 63.75,123.75 61.194,126.306 X14.15
VDD3_f: C12.2 L6.2 X5.20 | length 16.4
  Bottom Layer w0.508: C12.2 L6.2 38.566,30.134 45.2,23.5 X5.20
VDD_a: C17.1 C18.2 L9.1 P7.2 X10.15 X14.10 | length 128.7
  Top Layer w0.508: P7.2 X10.15
  Bottom Layer w0.508: P7.2 47.795,86.195 52.5,90.9 52.5,111.5 54.606,113.606 X14.10 ; C18.2 L9.1@47.415,35.5 ; L9.1 L9.1@47.415,35.5 ; X10.15 61.555,86.195 65.25,82.5 65.25,45.25 58.75,38.75 44,38.75 43.25,38 C17.1 47.165,35.75 L9.1@47.415,35.5
VDD_f: C20.2 L10.2 X5.18 | length 11
  Bottom Layer w0.508: X5.18 L10.2 C20.2
VPD: P20.1 P22.1 X11.5 X13.16 | length 124.7
  Top Layer w0.508: P20.1 38.5,101.2 39.3,100.4 52.6,100.4 70.678,82.322 76.578,82.322 76.6,82.3 87.1,82.3 88.673,83.873 P22.1 91.356,86.144 96.436,81.064 X11.5
  Bottom Layer w0.508: P22.1 88.673,122.673 94.846,128.846 X13.16
VPD_a: P22.2 X5.17 X11.10 X13.15 | length 150
  Top Layer w0.508: X11.10 P22.2
  Bottom Layer w0.508: X5.17 55,26.25 56.5,27.75 58.75,27.75 59.75,28.75 59.75,36.25 66.75,43.25 66.75,82.75 70.144,86.144 X11.10 ; P22.2 86.133,84.117 87.5,82.75 90.25,82.75 91,83.5 91,87.75 91,121.25 96.056,126.306 X13.15
VR: P32.1 X2.2 X12.5 X14.4 | length 111.8
  Top Layer w0.508: X2.2 16.233,45.7 23.2,45.7 26.5,49 26.5,51.75 28.825,54.075 X12.5 P32.1
  Bottom Layer w0.508: X14.4 36.024,121.226 37,120.25 37,110.25 34.4,107.65 34.4,94.6 37,92 37,57.25 40.175,54.075 P32.1
VR_a: C1.1 C2.2 L1.1 P32.2 X12.10 X14.5 | length 183.9
  Top Layer w0.508: P32.2 48.925,54.075 54.005,48.995 X12.10
  Bottom Layer w0.508: C2.2 L1.1 C1.1 20.925,10.875 19.6,12.2 19.6,39.1 25,44.5 47,44.5 51.495,48.995 X12.10 ; X14.5 32.436,118.686 31.5,117.75 31.5,114 24.75,107.25 24.75,97.45 30.7,91.5 33.9,91.5 35.75,89.65 35.75,55 39.95,50.8 44.2,50.8 46.117,52.717 P32.2
VR_f: C4.2 L2.2 X5.19 | length 24.5
  Bottom Layer w0.508: C4.2 34.11,5.629 L2.2 37.24,5.665 42.375,10.8 42.375,10.875 48.875,10.875 50,12 X5.19
VRef: P8.2 P13.2 P14.2 P15.2 P16.2 P17.2 X3.2 | length 54.2
  Top Layer w0.508: X3.2 11.217,87.783 10.3,88.7 10.3,108.05 12.45,110.2 19.6,110.2 20.66,111.26 P8.2 P13.2 P14.2 P15.2 P16.2 P17.2
VRef_OUT1_VPD: P20.2 X9.7
VRef_OUT2_VCM: P26.2 X9.8
VRef_OUT3_VBI: P29.2 X9.9
VRef_OUT4_Relay: P21.2 X9.10
"VRef_OUT5_Relay Shunt": P27.2 X9.11
VRef_OUT6_Reserve: P30.2 X9.12
VRef_Relay: P21.1 X6.13 X10.13 X11.13 X12.13 | length 177.7
  Top Layer w0.508: P21.1 33.773,134.273 31.5,132 31.5,110.25 34.25,107.5 34.25,97.75 40.25,91.75 57.5,91.75 61.25,88 61.25,82.75 ; X10.13 59.615,81.115 61.25,82.75 ; X11.13 65.476,78.524 61.25,82.75
  Bottom Layer w0.508: X12.13 55.385,56.615 54.75,57.25 54.75,62.203 55.523,62.977 57.977,62.977 58.75,63.75 58.75,65.25 55,69 55,74 55.375,74.375 55.375,74.455 55.672,74.753 58.003,74.753 58.75,75.5 58.75,76.383 57.817,77.317 55.547,77.317 54.75,78.113 54.75,80.25 55.615,81.115 X10.13 ; X6.13 73.976,54.024 72.75,55.25 72.75,59.25 73.886,60.386 76.578,60.386 77.192,61 77.25,61 77.25,65.75 76.5,66.5 74,66.5 73,67.5 73,71.5 73.686,72.186 76.586,72.186 77.8,73.4 77.8,77.7 76.976,78.524 X11.13
VRef_Relay_Shunt: P27.1 X13.13 X14.13 | length 57.5
  Top Layer w0.508: P27.1 55.5,121.75 56.024,121.226 X14.13 71.226,121.226 72.508,122.508 91.992,122.508 93.274,121.226 X13.13
VRef_Reserve: P28.1 P30.1 | length 75.9
  Top Layer w0.508: P28.1 15.45,124 17,125.55 17,133.8 25.2,142 37.7,142 40,139.7 71.2,139.7 72.5,138.4 P30.1
VRS: P31.1 X2.1 X12.2 X14.1 | length 111.5
  Top Layer w0.508: X2.1 14.15,54.75 16.65,57.25 24,57.25 27.945,61.195 28.445,61.695 X12.2 P31.1
  Bottom Layer w0.508: X14.1 38.904,128.846 43,124.75 43,111.5 40,108.5 40,70.654 43.577,67.077 P31.1
VRS_a: C5.1 C6.2 L3.1 P31.2 X12.15 X14.2 | length 178.1
  Top Layer w0.508: P31.2 X12.15
  Bottom Layer w0.508: C6.2 L3.1 C5.1 23.834,40.334 26,42.5 56.5,42.5 61.75,47.75 61.75,58.5 58.555,61.695 X12.15 ; X14.2 37.444,126.306 39.25,124.5 39.25,109.75 36.2,106.7 36.2,96.55 38.4,94.35 38.4,61.6 41.75,58.25 45,58.25 46.117,59.367 P31.2
VRS_f: C8.2 L4.2 X5.21 | length 13.8
  Bottom Layer w0.508: C8.2 L4.2 37.735,17.665 39.9,15.5 X5.21
VTDI: P4.1 X3.1 X6.2 X13.1 | length 232.7
  Top Layer w0.508: P4.1 X6.2
  Bottom Layer w0.508: X3.1 11.25,92 10.3,92.95 10.3,108 17,114.7 17,130.2 18.8,132 69.75,132 72.904,128.846 X13.1 85.346,128.846 88.75,132.25 100.35,132.25 102.4,130.2 102.4,107.9 95.75,101.25 95.75,66.25 94,64.5 94,51.5 91.444,48.944 P4.1
VTDI_a: C13.1 C14.2 L7.1 P4.2 X6.15 X13.2 | length 118.2
  Top Layer w0.508: X6.15 P4.2
  Bottom Layer w0.508: C14.2 L7.1 75.135,36.965 74.035,38.065 C13.1 74.035,48.335 74.644,48.944 X6.15 ; X13.2 72.556,126.306 69.75,123.5 69.75,98.5 80.75,87.5 80.75,57.5 86.133,52.117 P4.2
VTDI_f: C16.2 L8.2 X5.11 | length 18.5
  Bottom Layer w0.508: C16.2 69.895,29.56 70,29.455 X5.11
pads on no net: P19.2 P28.2 X1.3 X4.1 X4.10 X4.13 X4.14 X4.15 X4.17 X4.18 X4.19 X4.32 X4.33 X4.35 X4.36 X4.37 X13.3 X13.6 X13.9 X13.14 X14.3 X14.6 X14.9 X14.14

## Polygon pours and split planes (outlines as drawn)
GND on Bottom Layer "NONET_L-01_P-001" (hatched 90Degree grid 0.5 track 0.2, remove dead copper, pour order 48): 149,1 1,1 1,149 149,149
no net on Bottom Layer "NONET_L-01_P-001" (hatched 90Degree grid 0.5 track 0.2, remove dead copper, pour order 38): 1,149
no net on Bottom Layer "NONET_L-01_P-001" (hatched 90Degree grid 0.5 track 0.2, remove dead copper, pour order 34): 0.5,0.5
no net on Bottom Layer "NONET_L-01_P-001" (hatched 90Degree grid 0.5 track 0.2, remove dead copper, pour order 2): 26.75,129.25
no net on Bottom Layer "NONET_L-01_P-001" (hatched 90Degree grid 0.5 track 0.2, remove dead copper, pour order 0): 29.5,129
VRef_OUT3_VBI on Top Layer "NONET_L-01_P-001" (hatched 90Degree grid 0.5 track 0.2, remove dead copper, pour order 32): 71,104.5 74.25,104.5 74.25,107.25 77.25,107.25 77.25,101.5 71,101.5
no net on Top Layer "NONET_L-01_P-001" (hatched 90Degree grid 0.5 track 0.2, remove dead copper, pour order 30): 77.25,103.25
VRef_OUT3_VBI on Top Layer "NONET_L-01_P-001" (hatched 90Degree grid 0.5 track 0.2, remove dead copper, pour order 28): 74.25,105.25
VRef_OUT3_VBI on Top Layer "NONET_L-01_P-001" (hatched 90Degree grid 0.5 track 0.2, remove dead copper, pour order 26): 110.5,106.5
VRef_OUT6_Reserve on Top Layer "NONET_L-01_P-001" (hatched 90Degree grid 0.5 track 0.2, remove dead copper, pour order 20): 77.25,138.5 77.25,132.5 70.75,132.5 70.75,135.75 74.25,135.75 74.25,138.5
VRef_OUT2_VCM on Top Layer "NONET_L-01_P-001" (hatched 90Degree grid 0.5 track 0.2, remove dead copper, pour order 18): 60.25,107.25 60.25,101.5 54,101.5 54,104.5 57.5,104.5 57.5,107.25
no net on Top Layer "NONET_L-01_P-001" (hatched 90Degree grid 0.5 track 0.2, remove dead copper, pour order 16): 41.5,106.25
VRef_OUT1_VPD on Top Layer "NONET_L-01_P-001" (hatched 90Degree grid 0.5 track 0.2, remove dead copper, pour order 14): 43.25,107.5 43.25,101.25 40.25,101.25 40.25,104.25 36.75,104.25 36.75,107.5
"VRef_OUT5_Relay Shunt" on Top Layer "NONET_L-01_P-001" (hatched 90Degree grid 0.5 track 0.2, remove dead copper, pour order 12): 53.75,138.5 60.25,138.5 60.25,132.5 57.25,132.5 57.25,135.5 53.75,135.5
VRef_OUT4_Relay on Top Layer "NONET_L-01_P-001" (hatched 90Degree grid 0.5 track 0.2, remove dead copper, pour order 8): 40.25,135.5 40.25,132.5 43.25,132.5 43.25,138.5 36.75,138.5 36.75,135.5

## Other copper
Bottom Layer:
  pour cut-out: 100,0 100,12 40,12 40,0
  pour cut-out: 100,0
  pour cut-out: 107,150 107,88.5 150,88.5 150,150
  pour cut-out: 78.5,99.5 86.5,99.5 86.5,91.5 78.5,91.5
  pour cut-out: 78.5,148.5 86.5,148.5 86.5,140.5 78.5,140.5
  pour cut-out: 43.5,148.5 51.5,148.5 51.5,140.5 43.5,140.5
  pour cut-out: 25.5,141.5 33.5,141.5 33.5,133.5 25.5,133.5
  pour cut-out: 25.5,106.5 33.5,106.5 33.5,98.5 25.5,98.5
  pour cut-out: 43.5,99.5 51.5,99.5 51.5,91.5 43.5,91.5
  pour cut-out: 0,10 10,10 10,0 0,0
  pour cut-out: 140,10 150,10 150,0 140,0
  pour cut-out: 0,150 10,150 10,140 0,140

## Silkscreen, mask and mechanical layers (free items; w line width, h text height)
Top Overlay:
  pour cut-out: 131.5,133.5
  lines w0.254: 55.5,138.5 55.5,139.5 57.4,141.4 ; 72.5,138.5 72.5,139.25 73,139.75 77.25,139.75 ; 94.5,22.5 96.5,22.5 ; 97,15.75 97.75,15 97.75,14.25 ; 104.3,11.3 104.3,7.8 108.7,3.4 ; 129.6,40.077 129.6,83.257 129.6,85.65
  text "GND" at 14.39,136.5 h1.52 r90
  text "GND" at 19.59,136.5 h1.52 r90
  text "GND" at 24.79,136.5 h1.52 r90
  text "GND" at 127.569,86.25 h1.52
  text "REL_AMP_SHUNT" at 106,82.45 h1.52
  text "REL_VPD" at 115.141,79.927 h1.52
  text "REL_VBI" at 115.649,77.403 h1.52
  text "REL_VDD" at 115.141,74.88 h1.52
  text "REL_VDD3" at 113.618,72.357 h1.52
  text "REL_VCM" at 115.141,69.833 h1.52
  text "REL_VTDI" at 114.125,67.31 h1.52
  text "REL_VRS" at 115.141,64.787 h1.52
  text "REL_VR" at 116.665,62.264 h1.52
  text "REV" at 121.235,59.486 h1.52
  text "RN" at 122.759,56.963 h1.52
  text "INT" at 121.489,54.44 h1.52
  text "CLK32" at 118.188,51.916 h1.52
  text "SERDAT" at 116.665,49.393 h1.52
  text "CLK" at 121.235,46.87 h1.52
  text "SYNC" at 119.712,44.347 h1.52
  text "OUT2" at 119.712,41.823 h1.52
  text "OUT1" at 120.219,39.3 h1.52
  text "OPTO aabal" at 33.5,38.8 h2.5
  text "Photomodule / Multiplexer" at 15.797,34.8 h2.5
  text "REV" at 80.222,32.8 h1.52 r90
  text "RN" at 88.972,32.8 h1.52 r90
  text "INT" at 97.722,32.8 h1.52 r90
  text "CLK32" at 106.472,32.8 h1.52 r90
  text "SERDAT" at 106.6,23.238 h1.52
  text "8.REV" at 24.3,21 h1.52 r90
  text "6.RN" at 27.667,21 h1.52 r90
  text "4.INT" at 31.033,21 h1.52 r90
  text "2.CLK32" at 34.4,21 h1.52 r90
  text "8.REV" at 75,20.072 h1.52 r90
  text "CLK" at 106.6,14.738 h1.52
  text "9.OUT1" at 72.6,11.564 h1.52 r90
  text "9.OUT1" at 22.8,7.5 h1.52 r90
  text "7.OUT2" at 26.087,7.5 h1.52 r90
  text "5.SYNC" at 29.375,7.5 h1.52 r90
  text "3.SERDAT" at 32.662,7.5 h1.52 r90
  text "1.CLK" at 35.95,7.5 h1.52 r90
  text "J is ON = GPO FPGA LOAD" at 100.8,1 h1.52
Bottom Overlay:
  lines w0.254: 79.6,9.3 79.6,29
  text "10.GND" at 77.4,19.437 h1.52 r270
  text "20.VDD3" at 81.9,19.1 h1.52 r270
  text "18.VDD" at 85.06,19.1 h1.52 r270
  text "16.GND" at 88.22,19.1 h1.52 r270
  text "14.GND" at 91.38,19.1 h1.52 r270
  text "12.GND" at 94.54,19.1 h1.52 r270
  text "10.GND" at 97.7,19.1 h1.52 r270
  text "20.VDD3" at 43.1,18.548 h1.52 r270
  text "21.VRS" at 40.7,11.437 h1.52 r270
  text "11.VTDI" at 74.5,11.056 h1.52 r270
  text "21.VRS" at 80.25,9.3 h1.52 r270
  text "19.VR" at 83.4,9.3 h1.52 r270
  text "17.VPD" at 86.55,9.3 h1.52 r270
  text "15.VBI" at 89.7,9.3 h1.52 r270
  text "13.VCM" at 92.85,9.3 h1.52 r270
  text "11.VTDI" at 96,9.3 h1.52 r270
Mechanical 1:
  circle w0.254: c142.5,112.5 r4
  circle w0.254: c142.5,127.5 r4
  circle w0.254: c135.5,102.5 r1.5
  circle w0.254: c135.5,137.5 r1.5
  circle w0.254: c82.5,144.5 r1.5
  circle w0.254: c47.5,144.5 r1.5
  circle w0.254: c29.5,137.5 r1.5
  circle w0.254: c29.5,102.5 r1.5
  circle w0.254: c47.5,95.5 r1.5
  circle w0.254: c82.5,95.5 r1.5
  circle w0.254: c5,5 r2
  circle w0.254: c145,5 r2
  circle w0.254: c145,145 r2
  circle w0.254: c5,145 r2
  circle w0.254: c45,3 r0.6
  circle w0.254: c47.5,3 r0.6
  circle w0.254: c50,3 r0.6
  circle w0.254: c52.5,3 r0.6
  circle w0.254: c55,3 r0.6
  circle w0.254: c57.5,3 r0.6
  circle w0.254: c60,3 r0.6
  circle w0.254: c62.5,3 r0.6
  circle w0.254: c65,3 r0.6
  circle w0.254: c67.5,3 r0.6
  circle w0.254: c70,3 r0.6
  circle w0.254: c72.5,3 r0.6
  circle w0.254: c75,3 r0.6
  circle w0.254: c77.5,3 r0.6
  circle w0.254: c80,3 r0.6
  circle w0.254: c82.5,3 r0.6
  circle w0.254: c85,3 r0.6
  circle w0.254: c87.5,3 r0.6
  circle w0.254: c90,3 r0.6
  circle w0.254: c92.5,3 r0.6
  circle w0.254: c95,3 r0.6
  circle w0.254: c95,8 r0.6
  circle w0.254: c92.5,8 r0.6
  circle w0.254: c90,8 r0.6
  circle w0.254: c87.5,8 r0.6
  circle w0.254: c85,8 r0.6
  circle w0.254: c82.5,8 r0.6
  circle w0.254: c80,8 r0.6
  circle w0.254: c77.5,8 r0.6
  circle w0.254: c75,8 r0.6
  circle w0.254: c72.5,8 r0.6
  circle w0.254: c70,8 r0.6
  circle w0.254: c67.5,8 r0.6
  circle w0.254: c65,8 r0.6
  circle w0.254: c62.5,8 r0.6
  circle w0.254: c60,8 r0.6
  circle w0.254: c57.5,8 r0.6
  circle w0.254: c55,8 r0.6
  circle w0.254: c52.5,8 r0.6
  circle w0.254: c50,8 r0.6
  circle w0.254: c47.5,8 r0.6
  circle w0.254: c45,8 r0.6
  lines w0.254: 0,0 0,150 150,150 150,0 0,0 ; 110.25,91.75 110.25,150 128.75,150 128.75,91.75 110.25,91.75

## Text inside footprints (layer, text, board x,y; h text height)
X5: Top Overlay "2.CLK32" at 98.7,16.992 h1.52 r90; Top Overlay "1.CLK" at 98.5,7.246 h1.52 r90
X8: Top Overlay "Connector Hole" at 109.25,112.262 h1.52 r90; Top Overlay "Area       Center" at 64.25,108.629 h1.52 r90; Top Overlay "Photosensitive" at 61.8,110.097 h1.52 r90
X9: Bottom Overlay "IN" at 29.393,129.7 h1.52; Bottom Overlay "OUT6" at 79.913,130.625 h1.52; Bottom Overlay "OUT5" at 62.813,130.525 h1.52; Bottom Overlay "OUT4" at 45.713,130.525 h1.52; Bottom Overlay "OUT3" at 79.413,107.628 h1.52; Bottom Overlay "OUT2" at 62.813,107.628 h1.52; Bottom Overlay "OUT1" at 45.513,107.628 h1.52